# EAGLE board CT_schematic (EAGLE 7.6.0)

Size 100 x 80 mm. Coordinates in mm from the lower left corner, seen from the top.
Outline: 0,0 100,0 100,80 0,80 0,0
Copper layers (1*16): Top 0.035mm / dielectric 1.5mm / Bottom 0.035mm
Design rules "default": minimum track width 10mil, minimum drill 24mil, track to track 8mil, track to pad 8mil, pad to pad 8mil, via to via 8mil, smd to smd 8mil, copper to edge 40mil, drill to drill 8mil, minimum pad ring 10mil, minimum via ring 8mil, stop-mask expansion 4mil, vias tented up to drill 0mil, thermal gap 10mil

## Footprints (pad centres in the part's own frame; a part is rotated, then mirrored left to right if it is on the bottom)
C0603 = smd 0.8 x 0.8: 1 -0.762,0; 2 0.762,0
C0402 = smd 0.5 x 0.5: 1 -0.508,0; 2 0.508,0
C1206 = smd 1.3 x 1.6: 1 -1.524,0; 2 1.524,0
C0805 = smd 1.2 x 1.3: 1 -1.016,0; 2 1.016,0
C1210 = smd 1.2 x 2.5: 1 -1.524,0; 2 1.524,0
R0603 = smd 0.8 x 0.8: 1 -0.762,0; 2 0.762,0
EXV-9H = smd 3.505 x 1.676: 1 -2.857,0; 2 2.857,0
L0603 = smd 0.8 x 0.8: 1 -0.762,0; 2 0.762,0
DR1040 = smd 1.6 x 3.2: 1 -4.458,0; 2 4.458,0
PJ-037B_PACKAGE = drill 3.7 square: 1 12,0 | drill 3.2 square: 2 6,0
LQFP176 = smd 0.3 x 1.2: 1 -10.75,-12.75; 2 -10.25,-12.75; 3 -9.75,-12.75; 4 -9.25,-12.75; 5 -8.75,-12.75; 6 -8.25,-12.75; 7 -7.75,-12.75; 8 -7.25,-12.75; 9 -6.75,-12.75; 10 -6.25,-12.75; 11 -5.75,-12.75; 12 -5.25,-12.75; 13 -4.75,-12.75; 14 -4.25,-12.75; 15 -3.75,-12.75; 16 -3.25,-12.75; 17 -2.75,-12.75; 18 -2.25,-12.75; 19 -1.75,-12.75; 20 -1.25,-12.75; 21 -0.75,-12.75; 22 -0.25,-12.75; 23 0.25,-12.75; 24 0.75,-12.75; 25 1.25,-12.75; 26 1.75,-12.75; 27 2.25,-12.75; 28 2.75,-12.75; 29 3.25,-12.75; 30 3.75,-12.75; 31 4.25,-12.75; 32 4.75,-12.75; 33 5.25,-12.75; 34 5.75,-12.75; 35 6.25,-12.75; 36 6.75,-12.75; 37 7.25,-12.75; 38 7.75,-12.75; 39 8.25,-12.75; 40 8.75,-12.75; 41 9.25,-12.75; 42 9.75,-12.75; 43 10.25,-12.75; 44 10.75,-12.75; 89 10.75,12.75; 90 10.25,12.75; 91 9.75,12.75; 92 9.25,12.75; 93 8.75,12.75; 94 8.25,12.75; 95 7.75,12.75; 96 7.25,12.75; 97 6.75,12.75; 98 6.25,12.75; 99 5.75,12.75; 100 5.25,12.75; 101 4.75,12.75; 102 4.25,12.75; 103 3.75,12.75; 104 3.25,12.75; 105 2.75,12.75; 106 2.25,12.75; 107 1.75,12.75; 108 1.25,12.75; 109 0.75,12.75; 110 0.25,12.75; 111 -0.25,12.75; 112 -0.75,12.75; 113 -1.25,12.75; 114 -1.75,12.75; 115 -2.25,12.75; 116 -2.75,12.75; 117 -3.25,12.75; 118 -3.75,12.75; 119 -4.25,12.75; 120 -4.75,12.75; 121 -5.25,12.75; 122 -5.75,12.75; 123 -6.25,12.75; 124 -6.75,12.75; 125 -7.25,12.75; 126 -7.75,12.75; 127 -8.25,12.75; 128 -8.75,12.75; 129 -9.25,12.75; 130 -9.75,12.75; 131 -10.25,12.75; 132 -10.75,12.75 | smd 1.2 x 0.3: 45 12.75,-10.75; 46 12.75,-10.25; 47 12.75,-9.75; 48 12.75,-9.25; 49 12.75,-8.75; 50 12.75,-8.25; 51 12.75,-7.75; 52 12.75,-7.25; 53 12.75,-6.75; 54 12.75,-6.25; 55 12.75,-5.75; 56 12.75,-5.25; 57 12.75,-4.75; 58 12.75,-4.25; 59 12.75,-3.75; 60 12.75,-3.25; 61 12.75,-2.75; 62 12.75,-2.25; 63 12.75,-1.75; 64 12.75,-1.25; 65 12.75,-0.75; 66 12.75,-0.25; 67 12.75,0.25; 68 12.75,0.75; 69 12.75,1.25; 70 12.75,1.75; 71 12.75,2.25; 72 12.75,2.75; 73 12.75,3.25; 74 12.75,3.75; 75 12.75,4.25; 76 12.75,4.75; 77 12.75,5.25; 78 12.75,5.75; 79 12.75,6.25; 80 12.75,6.75; 81 12.75,7.25; 82 12.75,7.75; 83 12.75,8.25; 84 12.75,8.75; 85 12.75,9.25; 86 12.75,9.75; 87 12.75,10.25; 88 12.75,10.75; 133 -12.75,10.75; 134 -12.75,10.25; 135 -12.75,9.75; 136 -12.75,9.25; 137 -12.75,8.75; 138 -12.75,8.25; 139 -12.75,7.75; 140 -12.75,7.25; 141 -12.75,6.75; 142 -12.75,6.25; 143 -12.75,5.75; 144 -12.75,5.25; 145 -12.75,4.75; 146 -12.75,4.25; 147 -12.75,3.75; 148 -12.75,3.25; 149 -12.75,2.75; 150 -12.75,2.25; 151 -12.75,1.75; 152 -12.75,1.25; 153 -12.75,0.75; 154 -12.75,0.25; 155 -12.75,-0.25; 156 -12.75,-0.75; 157 -12.75,-1.25; 158 -12.75,-1.75; 159 -12.75,-2.25; 160 -12.75,-2.75; 161 -12.75,-3.25; 162 -12.75,-3.75; 163 -12.75,-4.25; 164 -12.75,-4.75; 165 -12.75,-5.25; 166 -12.75,-5.75; 167 -12.75,-6.25; 168 -12.75,-6.75; 169 -12.75,-7.25; 170 -12.75,-7.75; 171 -12.75,-8.25; 172 -12.75,-8.75; 173 -12.75,-9.25; 174 -12.75,-9.75; 175 -12.75,-10.25; 176 -12.75,-10.75
SOT-23-6 = smd 1.1 x 0.6: 1 -1.4,0.95; 2 -1.4,0; 3 -1.4,-0.95; 4 1.4,-0.95; 5 1.4,0; 6 1.4,0.95
TST-110-05-T-D-RA = drill 1 pad 1.7 square: 1 0,0 | drill 1 pad 1.7: 2 0,2.54; 3 2.54,0; 4 2.54,2.54; 5 5.08,0; 6 5.08,2.54; 7 7.62,0; 8 7.62,2.54; 9 10.16,0; 10 10.16,2.54; 11 12.7,0; 12 12.7,2.54; 13 15.24,0; 14 15.24,2.54; 15 17.78,0; 16 17.78,2.54; 17 20.32,0; 18 20.32,2.54; 19 22.86,0; 20 22.86,2.54
LBGA-64 = smd 0.559 x 0.559: A1 -3.5,3.5; A2 -2.5,3.5; A3 -1.5,3.5; A4 -0.5,3.5; A5 0.5,3.5; A6 1.5,3.5; A7 2.5,3.5; A8 3.5,3.5; B1 -3.5,2.5; B2 -2.5,2.5; B3 -1.5,2.5; B4 -0.5,2.5; B5 0.5,2.5; B6 1.5,2.5; B7 2.5,2.5; B8 3.5,2.5; C1 -3.5,1.5; C2 -2.5,1.5; C3 -1.5,1.5; C4 -0.5,1.5; C5 0.5,1.5; C6 1.5,1.5; C7 2.5,1.5; C8 3.5,1.5; D1 -3.5,0.5; D2 -2.5,0.5; D3 -1.5,0.5; D4 -0.5,0.5; D5 0.5,0.5; D6 1.5,0.5; D7 2.5,0.5; D8 3.5,0.5; E1 -3.5,-0.5; E2 -2.5,-0.5; E3 -1.5,-0.5; E4 -0.5,-0.5; E5 0.5,-0.5; E6 1.5,-0.5; E7 2.5,-0.5; E8 3.5,-0.5; F1 -3.5,-1.5; F2 -2.5,-1.5; F3 -1.5,-1.5; F4 -0.5,-1.5; F5 0.5,-1.5; F6 1.5,-1.5; F7 2.5,-1.5; F8 3.5,-1.5; G1 -3.5,-2.5; G2 -2.5,-2.5; G3 -1.5,-2.5; G4 -0.5,-2.5; G5 0.5,-2.5; G6 1.5,-2.5; G7 2.5,-2.5; G8 3.5,-2.5; H1 -3.5,-3.5; H2 -2.5,-3.5; H3 -1.5,-3.5; H4 -0.5,-3.5; H5 0.5,-3.5; H6 1.5,-3.5; H7 2.5,-3.5; H8 3.5,-3.5
RTL8201FL-VB-CG = smd 0.27 x 1: 1 0,0; 2 0.5,0; 3 1,0; 4 1.5,0; 5 2,0; 6 2.5,0; 7 3,0; 8 3.5,0; 9 4,0; 10 4.5,0; 11 5,0; 12 5.5,0; 25 5.5,8; 26 5,8; 27 4.5,8; 28 4,8; 29 3.5,8; 30 3,8; 31 2.5,8; 32 2,8; 33 1.5,8; 34 1,8; 35 0.5,8; 36 0,8 | smd 1 x 0.27: 13 6.75,1.25; 14 6.75,1.75; 15 6.75,2.25; 16 6.75,2.75; 17 6.75,3.25; 18 6.75,3.75; 19 6.75,4.25; 20 6.75,4.75; 21 6.75,5.25; 22 6.75,5.75; 23 6.75,6.25; 24 6.75,6.75; 37 -1.25,6.75; 38 -1.25,6.25; 39 -1.25,5.75; 40 -1.25,5.25; 41 -1.25,4.75; 42 -1.25,4.25; 43 -1.25,3.75; 44 -1.25,3.25; 45 -1.25,2.75; 46 -1.25,2.25; 47 -1.25,1.75; 48 -1.25,1.25
7498011122R = smd 0.71 x 2.29: 1 -3.545,-3.18; 2 -2.525,-3.18; 3 -1.505,-3.18; 4 -0.485,-3.18; 5 0.535,-3.18; 6 1.555,-3.18; 8 3.595,-3.18; 9 5.635,-3.18; 10 6.655,-3.18; 11 -6.605,-3.18; 12 -5.585,-3.18 | smd 1.4 x 2.54: 13 -8.51,10.2; 14 8.51,10.2 | hole 1.4: -3.5,0; 3.5,0
USB-A-H = drill 0.914: 1 2.718,3.493; 2 2.718,1.003; 3 2.718,-1.003; 4 2.718,-3.493 | drill 2.311: 5 0,-6.566; 6 0,6.566
SOT143B = smd 1 x 0.7: 1 -0.75,-1 | smd 0.6 x 0.7: 2 0.95,-1; 3 0.95,1; 4 -0.95,1
ABS07-32.768KHZ-7-T = smd 1.1 x 2.4: 1 -2.5,0; 2 0,0
ABLS-25.000MHZ-B2F-T = smd 5.6 x 2.8: 1 -3.81,0; 2 5.69,0
ASFL1 = smd 1.7 x 1.5: 1 -1.27,-1.1; 2 1.27,-1.1; 3 1.27,1.1; 4 -1.27,1.1
WSON-8 = smd 0.3 x 0.6: 1 -0.75,0; 2 0.05,0; 3 0.85,0; 4 1.65,0; 5 1.65,3.8; 6 0.85,3.8; 7 0.05,3.8; 8 -0.75,3.8 | smd 3 x 2.6: PAD 0.45,1.9
HTSSOP14 = smd 1.676 x 0.356: 1 -2.8,1.95; 2 -2.8,1.3; 3 -2.8,0.65; 4 -2.8,0; 5 -2.8,-0.65; 6 -2.8,-1.3; 7 -2.8,-1.95; 8 2.8,-1.95; 9 2.8,-1.3; 10 2.8,-0.65; 11 2.8,0; 12 2.8,0.65; 13 2.8,1.3; 14 2.8,1.95 | smd 3 x 5: 15 0,0 | drill 0.4 pad 0.45: P$1 -0.75,1.5; P$2 0.75,1.5; P$3 -0.75,0; P$4 0.8,0; P$5 -0.75,-1.5; P$6 0.9,-1.5
QFN-38_UHF = smd 0.75 x 0.3: 1 -2.4,2.75; 2 -2.4,2.25; 3 -2.4,1.75; 4 -2.4,1.25; 6 -2.4,0.25; 7 -2.4,-0.25; 8 -2.4,-0.75; 9 -2.4,-1.25; 10 -2.4,-1.75; 11 -2.4,-2.25; 12 -2.4,-2.75; 20 2.4,-2.75; 21 2.4,-2.25; 22 2.4,-1.75; 23 2.4,-1.25; 24 2.4,-0.75; 25 2.4,-0.25; 26 2.4,0.25; 27 2.4,0.75; 28 2.4,1.25; 29 2.4,1.75; 30 2.4,2.25; 31 2.4,2.75 | smd 0.758 x 0.3: 5 -2.4,0.75 | smd 0.3 x 0.75: 13 -1.5,-3.4; 14 -1,-3.4; 15 -0.5,-3.4; 16 0,-3.4; 17 0.5,-3.4; 18 1,-3.4; 19 1.5,-3.4; 32 1.5,3.4; 33 1,3.4; 34 0.5,3.4; 35 0,3.4; 36 -0.5,3.4; 37 -1,3.4; 38 -1.5,3.4 | smd 3.2 x 5.2: 39 0,0
IRF8306MTRPBF = smd 0.9 x 1.85: 1 0,0; 2 0,-2.35; 6 6.4,0; 7 6.4,-2.35 | smd 0.75 x 0.75: 3 1.75,-1.175 | smd 1.45 x 0.87: 4 3.5,-0.565; 5 3.5,-1.785
SW_4-1437565-2 = smd 1.4 x 2.1: 1 -2.23,4.55; 2 -2.23,-4.55; 3 2.23,4.55; 4 2.23,-4.55
LGM67K-G1J2-24-Z = smd 0.8 x 1.4: A -2,0; C 0,0
NC7SZ125M5X = smd 1.3 x 0.7: 1 -1.3,0.95; 2 -1.3,0; 3 -1.3,-0.95; 4 1.3,-0.95; 5 1.3,0.95

## Placement (x,y rotation side)
C1  1e-06  [C0603]  -57.15,88.9 0 top  (outside the outline)
C2  1e-07  [C0603]  -60.96,88.9 0 top  (outside the outline)
C3  1e-07  [C0603]  -64.77,88.9 0 top  (outside the outline)
C4  1e-07  [C0603]  -68.58,88.9 0 top  (outside the outline)
C5  1e-07  [C0603]  -72.39,88.9 0 top  (outside the outline)
C6  1e-07  [C0603]  -76.2,88.9 0 top  (outside the outline)
C7  1e-07  [C0603]  -80.01,88.9 0 top  (outside the outline)
C8  1e-07  [C0603]  -83.82,88.9 0 top  (outside the outline)
C9  1e-07  [C0603]  -87.63,88.9 0 top  (outside the outline)
C10  1e-07  [C0603]  -91.44,88.9 0 top  (outside the outline)
C11  1e-07  [C0603]  -95.25,88.9 0 top  (outside the outline)
C12  1e-07  [C0603]  -15.24,93.98 0 top  (outside the outline)
C13  1e-07  [C0603]  -19.05,93.98 0 top  (outside the outline)
C14  1e-07  [C0603]  -22.86,93.98 0 top  (outside the outline)
C15  1e-07  [C0603]  -26.67,93.98 0 top  (outside the outline)
C16  1e-07  [C0603]  -30.48,93.98 0 top  (outside the outline)
C17  1e-07  [C0603]  -34.29,93.98 0 top  (outside the outline)
C18  4.7e-06  [C0603]  -49.53,88.9 0 top  (outside the outline)
C19  1e-07  [C0603]  -38.1,93.98 0 top  (outside the outline)
C20  1e-08  [C0603]  -41.91,93.98 0 top  (outside the outline)
C21  1e-06  [C0603]  -45.72,93.98 0 top  (outside the outline)
C22  1e-07  [C0603]  -49.53,93.98 0 top  (outside the outline)
C23  1e-07  [C0603]  -53.34,93.98 0 top  (outside the outline)
C24  1e-07  [C0603]  -57.15,93.98 0 top  (outside the outline)
C25  1e-11  [C0402]  -77.47,99.06 0 top  (outside the outline)
C26  1e-11  [C0402]  -81.28,99.06 0 top  (outside the outline)
C27  1e-11  [C0402]  -85.09,99.06 0 top  (outside the outline)
C28  1e-11  [C0402]  -88.9,99.06 0 top  (outside the outline)
C29  1e-07  [C0402]  -92.71,99.06 0 top  (outside the outline)
C30  1e-07  [C0402]  -96.52,99.06 0 top  (outside the outline)
C31  1e-08  [C0402]  -15.24,104.14 0 top  (outside the outline)
C32  1e-08  [C0402]  -19.05,104.14 0 top  (outside the outline)
C33  2.2e-08  [C0402]  -69.85,99.06 0 top  (outside the outline)
C34  1e-06  [C0603]  -60.96,93.98 0 top  (outside the outline)
C35  1e-07  [C0402]  -22.86,104.14 0 top  (outside the outline)
C36  1e-08  [C0402]  -26.67,104.14 0 top  (outside the outline)
C37  1e-06  [C0603]  -64.77,93.98 0 top  (outside the outline)
C38  1e-07  [C0402]  -30.48,104.14 0 top  (outside the outline)
C39  1e-08  [C0402]  -34.29,104.14 0 top  (outside the outline)
C40  1e-07  [C0402]  -38.1,104.14 0 top  (outside the outline)
C41  1e-07  [C0402]  -41.91,104.14 0 top  (outside the outline)
C42  1e-08  [C0402]  -45.72,104.14 0 top  (outside the outline)
C43  1e-08  [C0402]  -49.53,104.14 0 top  (outside the outline)
C44  1e-05  [C1206]  -16.51,72.39 0 top  (outside the outline)
C45  1e-05  [C0805]  -77.47,72.39 0 top  (outside the outline)
C46  1e-06  [C0603]  -68.58,93.98 0 top  (outside the outline)
C47  3.3e-09  [C0402]  -73.66,99.06 0 top  (outside the outline)
C48  1e-07  [C0402]  -53.34,104.14 0 top  (outside the outline)
C49  2.2e-05  [C1210]  -78.74,64.77 0 top  (outside the outline)
C50  2.2e-05  [C1210]  -85.09,64.77 0 top  (outside the outline)
C51  1e-05  [C1206]  -22.86,72.39 0 top  (outside the outline)
C52  1e-05  [C1206]  -29.21,72.39 0 top  (outside the outline)
C53  1e-08  [C0402]  -57.15,104.14 0 top  (outside the outline)
C54  1e-05  [C1206]  -35.56,72.39 0 top  (outside the outline)
C55  1e-05  [C1210]  -91.44,64.77 0 top  (outside the outline)
C56  1e-08  [C0402]  -60.96,104.14 0 top  (outside the outline)
C57  1e-05  [C1206]  -41.91,72.39 0 top  (outside the outline)
C58  1e-05  [C0805]  -82.55,72.39 0 top  (outside the outline)
C59  1e-07  [C0402]  -64.77,104.14 0 top  (outside the outline)
C60  2.2e-06  [C0603]  -53.34,88.9 0 top  (outside the outline)
C61  2.45e-08  [R0603]  -52.07,78.74 0 top  (outside the outline)
C62  2.8258362168397e-09  [R0603]  -92.71,72.39 0 top  (outside the outline)
C63  7.105e-09  [R0603]  -31.75,78.74 0 top  (outside the outline)
C64  0.0001  [EXV-9H]  -81.28,55.88 0 top  (outside the outline)
C65  0.0001  [EXV-9H]  -92.71,55.88 0 top  (outside the outline)
C66  1e-08  [C0402]  -68.58,104.14 0 top  (outside the outline)
C67  1e-08  [C0402]  -72.39,104.14 0 top  (outside the outline)
C68  1e-08  [C0402]  -76.2,104.14 0 top  (outside the outline)
C69  1e-08  [C0402]  -80.01,104.14 0 top  (outside the outline)
F1  240.0  [L0603]  -72.39,93.98 0 top  (outside the outline)
I1  97.0  [R0603]  -76.2,93.98 0 top  (outside the outline)
I5  3.8e-06  [DR1040]  -71.12,34.29 0 top  (outside the outline)
J1  PJ-037B  [PJ-037B_PACKAGE]  -44.45,35.56 0 top  (outside the outline)
R2  1000.0  [R0603]  -80.01,93.98 0 top  (outside the outline)
R7  4700.0  [R0603]  -83.82,93.98 0 top  (outside the outline)
R8  4700.0  [R0603]  -87.63,93.98 0 top  (outside the outline)
R9  4700.0  [R0603]  -91.44,93.98 0 top  (outside the outline)
R10  2200.0  [R0603]  -95.25,93.98 0 top  (outside the outline)
R12  2200.0  [R0603]  -15.24,99.06 0 top  (outside the outline)
R14  47000.0  [R0603]  -57.15,78.74 0 top  (outside the outline)
R15  10000.0  [R0603]  -62.23,78.74 0 top  (outside the outline)
R16  10000.0  [R0603]  -67.31,78.74 0 top  (outside the outline)
R17  10000.0  [R0603]  -72.39,78.74 0 top  (outside the outline)
R18  1270.0  [R0603]  -19.05,99.06 0 top  (outside the outline)
R19  10000.0  [R0603]  -77.47,78.74 0 top  (outside the outline)
R20  10000.0  [R0603]  -82.55,78.74 0 top  (outside the outline)
R21  10000.0  [R0603]  -87.63,78.74 0 top  (outside the outline)
R22  10000.0  [R0603]  -92.71,78.74 0 top  (outside the outline)
R23  10000.0  [R0603]  -97.79,78.74 0 top  (outside the outline)
R24  10000.0  [R0603]  -15.24,83.82 0 top  (outside the outline)
R25  10000.0  [R0603]  -20.32,83.82 0 top  (outside the outline)
R26  10000.0  [R0603]  -25.4,83.82 0 top  (outside the outline)
R27  10000.0  [R0603]  -30.48,83.82 0 top  (outside the outline)
R28  10000.0  [R0603]  -35.56,83.82 0 top  (outside the outline)
R29  10000.0  [R0603]  -40.64,83.82 0 top  (outside the outline)
R30  10000.0  [R0603]  -45.72,83.82 0 top  (outside the outline)
R31  10000.0  [R0603]  -50.8,83.82 0 top  (outside the outline)
R32  0.1  [R0603]  -22.86,99.06 0 top  (outside the outline)
R33  0.1  [R0603]  -26.67,99.06 0 top  (outside the outline)
R34  200.0  [R0603]  -30.48,99.06 0 top  (outside the outline)
R35  200.0  [R0603]  -34.29,99.06 0 top  (outside the outline)
R36  2490.0  [R0603]  -38.1,99.06 0 top  (outside the outline)
R37  4700.0  [R0603]  -41.91,99.06 0 top  (outside the outline)
R38  10000.0  [R0603]  -55.88,83.82 0 top  (outside the outline)
R39  10000.0  [R0603]  -60.96,83.82 0 top  (outside the outline)
R40  10000.0  [R0603]  -66.04,83.82 0 top  (outside the outline)
R41  10000.0  [R0603]  -71.12,83.82 0 top  (outside the outline)
R42  10000.0  [R0603]  -76.2,83.82 0 top  (outside the outline)
R43  10000.0  [R0603]  -81.28,83.82 0 top  (outside the outline)
R44  100000.0  [R0603]  -36.83,78.74 0 top  (outside the outline)
R45  200.0  [R0603]  -45.72,99.06 0 top  (outside the outline)
R46  1000.0  [R0603]  -49.53,99.06 0 top  (outside the outline)
R47  71007.101651032  [R0603]  -19.05,78.74 0 top  (outside the outline)
R48  22000.0  [R0603]  -86.36,83.82 0 top  (outside the outline)
R49  100000.0  [R0603]  -41.91,78.74 0 top  (outside the outline)
R50  3900.0  [R0603]  -53.34,99.06 0 top  (outside the outline)
R51  1000.0  [R0603]  -57.15,99.06 0 top  (outside the outline)
R52  100000.0  [R0603]  -46.99,78.74 0 top  (outside the outline)
R53  200.0  [R0603]  -60.96,99.06 0 top  (outside the outline)
R54  1000.0  [R0603]  -64.77,99.06 0 top  (outside the outline)
R55  10000.0  [R0603]  -91.44,83.82 0 top  (outside the outline)
R56  75000.0  [R0603]  -96.52,83.82 0 top  (outside the outline)
R57  10000.0  [R0603]  -15.24,88.9 0 top  (outside the outline)
R58  10000.0  [R0603]  -20.32,88.9 0 top  (outside the outline)
R59  95300.0  [R0603]  -25.4,88.9 0 top  (outside the outline)
R60  95300.0  [R0603]  -30.48,88.9 0 top  (outside the outline)
R61  10000.0  [R0603]  -35.56,88.9 0 top  (outside the outline)
R62  10000.0  [R0603]  -40.64,88.9 0 top  (outside the outline)
R63  10000.0  [R0603]  -45.72,88.9 0 top  (outside the outline)
R64  85527.272727273  [R0603]  -26.67,78.74 0 top  (outside the outline)
U1  STM32F769IGT6  [LQFP176]  -45.72,13.97 0 top  (outside the outline)
U2  MAX4995AAUT+T  [SOT-23-6]  -46.99,71.12 0 top  (outside the outline)
U3  TST-110-05-T-D-RA  [TST-110-05-T-D-RA]  -73.66,53.34 0 top  (outside the outline)
U4  mt28ew512aba1HPC-0AAT  [LBGA-64]  -82.55,7.62 0 top  (outside the outline)
U5  RTL8201FL-VB-CG  [RTL8201FL-VB-CG]  -27.94,31.75 0 top  (outside the outline)
U6  7498011122R  [7498011122R]  -22.86,7.62 0 top  (outside the outline)
U7  61400416021  [USB-A-H]  -66.04,8.89 0 top  (outside the outline)
U8  prtr5v0u2ax  [SOT143B]  -92.71,104.14 0 top  (outside the outline)
U9  ABS07-32.768KHZ-7-T  [ABS07-32.768KHZ-7-T]  -49.53,66.04 0 top  (outside the outline)
U10  ABLS-25.000MHZ-B2F-T  [ABLS-25.000MHZ-B2F-T]  -26.67,66.04 0 top  (outside the outline)
U11  ASFL1-25MHZ-NCS  [ASFL1]  -26.67,57.15 0 top  (outside the outline)
U12  LP3878SDX-ADJ/NOPB  [WSON-8]  -45.72,45.72 0 top  (outside the outline)
U13  tps54325PWP  [HTSSOP14]  -58.42,64.77 0 top  (outside the outline)
U14  LP3878SDX-ADJ/NOPB  [WSON-8]  -66.04,45.72 0 top  (outside the outline)
U15  LP3878SDX-ADJ/NOPB  [WSON-8]  -86.36,45.72 0 top  (outside the outline)
U16  LTC2928CUHF#PBF  [QFN-38_UHF]  -34.29,55.88 0 top  (outside the outline)
U17  IRF8306MTRPbF  [IRF8306MTRPBF]  -90.17,34.29 0 top  (outside the outline)
U18  IRF8306MTRPbF  [IRF8306MTRPBF]  -26.67,48.26 0 top  (outside the outline)
U19  4-1437565-2  [SW_4-1437565-2]  -60.96,34.29 0 top  (outside the outline)
U20  Q65110A2395  [LGM67K-G1J2-24-Z]  -67.31,64.77 0 top  (outside the outline)
U21  nc7sz125m5x  [NC7SZ125M5X]  -52.07,72.39 0 top  (outside the outline)
U22  nc7sz125m5x  [NC7SZ125M5X]  -58.42,72.39 0 top  (outside the outline)
U23  nc7sz125m5x  [NC7SZ125M5X]  -64.77,72.39 0 top  (outside the outline)
U24  nc7sz125m5x  [NC7SZ125M5X]  -71.12,72.39 0 top  (outside the outline)

## Library data of the parts
C1-C69 F1 I1 I5 J1 R2 R7-R10 R12 R14-R64 U1-U24 = circuit_tree

## Nets
CLK_CRYSTAL_U1_9: C25.1 U1.9 U9.1
CLK_CRYSTAL_U1_10: C26.1 U1.10 U9.2
CLK_CRYSTAL_U1_29: C27.1 U1.29 U10.1
CLK_CRYSTAL_U1_30: C28.1 U1.30 U10.2
CLK_U5_43: U5.43 U11.3
GND: C1.2 C2.2 C3.2 C4.2 C5.2 C6.2 C7.2 C8.2 C9.2 C10.2 C11.2 C12.2 C13.2 C14.2 C15.2 C16.2 C17.2 C18.2 C19.2 C20.2 C21.2 C22.2 C23.2 C24.2 C25.2 C26.2 C27.2 C28.2 C29.2 C30.2 C31.2 C32.2 C33.2 C34.2 C35.2 C36.2 C37.2 C38.2 C39.2 C40.2 C41.2 C42.2 C43.2 C44.2 C45.2 C46.2 C47.2 C49.2 C50.2 C51.2 C52.2 C53.2 C54.2 C55.2 C56.2 C57.2 C58.2 C59.2 C60.2 C61.2 C62.2 C63.2 C64.2 C65.2 C66.2 C67.2 C68.2 C69.2 J1.2 R2.2 R14.2 R15.2 R18.2 R20.2 R26.2 R32.2 R33.2 R36.2 R38.2 R40.2 R41.2 R42.2 R46.2 R48.2 R51.2 R54.2 R56.2 R59.2 R60.2 R61.2 R62.2 R63.2 U1.14 U1.22 U1.37 U1.61 U1.71 U1.95 U1.103 U1.109 U1.117 U1.130 U1.135 U1.148 U1.158 U2.2 U3.4 U3.6 U3.8 U3.10 U3.12 U3.14 U3.16 U3.18 U3.20 U4.E8 U4.H2 U4.H7 U5.7 U5.20 U5.33 U5.42 U5.47 U6.11 U7.4 U7.5 U7.6 U8.1 U11.2 U12.3 U12.PAD U13.5 U13.8 U13.9 U13.15 U14.3 U14.PAD U15.3 U15.PAD U16.8 U16.9 U16.10 U16.12 U16.13 U16.24 U16.25 U16.30 U16.32 U16.39 U20.C U21.2 U21.3 U22.1 U22.3 U23.1 U23.3 U24.1 U24.3
NET_U1_31: R9.1 U1.31 U24.4
NET_U1_33: R10.1 U1.33 U5.30
NET_U1_39: C20.1 C21.1 F1.1 U1.38 U1.39
NET_U1_42: R12.1 U1.42 U5.31
NET_U1_48: R17.1 U1.48
NET_U1_100: U1.100
NET_U1_106: U1.106
NET_U1_125: R18.1 U1.125
NET_U1_129: C24.1 U1.129
NET_U1_166: R15.1 U1.166
NET_U1_171: R16.1 U1.171
NET_U1_175: U20.A
NET_U1_176: U19.3 U19.4
NET_U2_3: R14.1 U2.3
NET_U3_19: R26.1 U3.19
NET_U4_B4: R30.1 U4.B4
NET_U4_B5: R8.1 U4.B5 U23.4
NET_U5_6: C34.1 C35.1 C36.1 I1.1 U5.6 U5.41
NET_U5_10: R41.1 U5.10
NET_U5_28: U5.28
NET_U5_29: R7.1 U5.29 U22.4
NET_U5_32: R37.1 U5.32
NET_U5_34: R39.1 U5.34
NET_U5_35: R40.1 U5.35
NET_U5_40: C41.1 U5.40
NET_U5_46: R36.1 U5.46
NET_U5_48: C40.1 U5.48
NET_U6_1: U5.1 U6.1
NET_U6_3: U5.2 U6.3
NET_U6_4: U5.4 U6.4
NET_U6_5: C33.1 U6.2 U6.5
NET_U6_6: U5.5 U6.6
NET_U6_8: R33.1 U6.8
NET_U6_10: R34.1 U6.10
NET_U6_12: R35.1 U6.12
NET_U6_13: R32.1 U6.13 U6.14
NET_U6_34: R34.2
NET_U6_35: R35.2
NET_U12_1: C43.1 U12.1
NET_U12_6: R45.2 R46.1 U12.6
NET_U12_8: R44.1 U12.8
NET_U13_2: R47.2 R48.1 U13.2
NET_U13_3: C46.1 U13.3
NET_U13_4: C47.1 U13.4
NET_U13_10: C48.1 I5.1 U13.10 U13.11
NET_U13_12: C48.2 U13.12
NET_U14_1: C53.1 U14.1
NET_U14_6: R50.2 R51.1 U14.6
NET_U14_8: R49.1 U14.8
NET_U15_1: C56.1 U15.1
NET_U15_6: R53.2 R54.1 U15.6
NET_U15_8: R52.1 U15.8
NET_U16_3: R62.1 U16.3
NET_U16_6: R59.1 U16.6
NET_U16_7: R60.1 U16.7
NET_U16_16: R61.1 R64.1 U16.16
NET_U16_18: R58.1 U16.18
NET_U16_19: R57.1 U16.19 U16.20
NET_U16_21: R55.1 R56.1 U16.21 U21.4 U22.2 U23.2 U24.2
NET_U16_22: C59.1 R55.2 R57.2 R58.2 U16.11 U16.22
NET_U16_26: C62.1 U16.26
NET_U16_27: C61.1 U16.27
NET_U16_28: C63.1 U16.28
NET_U16_38: R63.1 U16.38
NET_U17_3: U16.2 U17.3
NET_U18_3: U16.37 U18.3
NET_U19_1: R2.1 U19.1 U19.2
PROC_ETH_COL: U1.44 U5.38
PROC_ETH_CRS: U1.43 U5.36
PROC_ETH_RX_CLK: U1.41 U5.19
PROC_ETH_RX_DV: R38.1 U1.53 U5.13
PROC_ETH_RX_ER: R43.1 U1.12 U5.39
PROC_ETH_RXD0: U1.54 U5.14
PROC_ETH_RXD1: U1.55 U5.16
PROC_ETH_RXD2: U1.56 U5.17
PROC_ETH_RXD3: R42.1 U1.57 U5.18
PROC_ETH_TX_CLK: U1.35 U5.22
PROC_ETH_TX_EN: U1.80 U5.27
PROC_ETH_TXD0: U1.85 U5.23
PROC_ETH_TXD1: U1.86 U5.24
PROC_ETH_TXD2: U1.34 U5.25
PROC_ETH_TXD3: U1.167 U5.26
PROC_FMC_A0: U1.16 U4.E2
PROC_FMC_A1: U1.17 U4.D2
PROC_FMC_A2: U1.18 U4.C2
PROC_FMC_A3: U1.19 U4.A2
PROC_FMC_A4: U1.20 U4.B2
PROC_FMC_A5: U1.21 U4.D3
PROC_FMC_A6: U1.60 U4.C3
PROC_FMC_A7: U1.63 U4.A3
PROC_FMC_A8: U1.64 U4.B6
PROC_FMC_A9: U1.65 U4.A6
PROC_FMC_A10: U1.66 U4.C6
PROC_FMC_A11: U1.67 U4.D6
PROC_FMC_A12: U1.110 U4.B7
PROC_FMC_A13: U1.111 U4.A7
PROC_FMC_A14: U1.112 U4.C7
PROC_FMC_A15: U1.113 U4.D7
PROC_FMC_A16: U1.92 U4.E7
PROC_FMC_A17: U1.93 U4.B3
PROC_FMC_A18: U1.94 U4.C4
PROC_FMC_A19: U1.2 U4.D5
PROC_FMC_A20: U1.3 U4.D4
PROC_FMC_A21: U1.4 U4.C5
PROC_FMC_A22: U1.5 U4.B8
PROC_FMC_A23: U1.1 U4.C8
PROC_FMC_A24: U1.156 U4.F8
PROC_FMC_D0: U1.97 U4.E3
PROC_FMC_D1: U1.98 U4.H3
PROC_FMC_D2: U1.142 U4.E4
PROC_FMC_D3: U1.143 U4.H4
PROC_FMC_D4: U1.68 U4.H5
PROC_FMC_D5: U1.69 U4.E5
PROC_FMC_D6: U1.70 U4.H6
PROC_FMC_D7: U1.73 U4.E6
PROC_FMC_D8: U1.74 U4.F3
PROC_FMC_D9: U1.75 U4.G3
PROC_FMC_D10: U1.76 U4.F4
PROC_FMC_D11: U1.77 U4.G4
PROC_FMC_D12: U1.78 U4.F5
PROC_FMC_D13: U1.89 U4.G6
PROC_FMC_D14: U1.90 U4.F6
PROC_FMC_D15: U1.91 U4.G7
PROC_FMC_INT: U1.115 U4.A4
PROC_FMC_NBL0: R31.1 U1.169 U4.F7
PROC_FMC_NE2: R27.1 U1.121 U4.F2
PROC_FMC_NOE: R28.1 U1.146 U4.G2
PROC_FMC_NWE: R29.1 U1.147 U4.A5
PROC_GPIO_TO_U1_USB_FAULT: R19.1 U1.8 U2.6
PROC_GPIO_TO_U1_VBUS_EN: R20.1 U1.7 U2.4
PROC_SYS_JTCK_SWCLK: R24.1 U1.137 U3.9
PROC_SYS_JTDI: R22.1 U1.138 U3.5
PROC_SYS_JTDO_SWO: U1.161 U3.13
PROC_SYS_JTMS_SWDIO: R23.1 U1.128 U3.7
PROC_SYS_JTRST: R21.1 U1.162 U3.3
PROC_USB_OTG_FS_DM: U1.126 U7.2 U8.3
PROC_USB_OTG_FS_DP: U1.127 U7.3 U8.2
PROC_USB_OTG_FS_VBUS: U1.124 U2.1 U7.1 U8.4
RST_OUT_U3_SRESET_B: R25.1 U3.15 U21.1
VCC_10V7: C60.1 C64.1 C65.1 J1.1 R64.2 U16.23 U17.1 U17.2 U17.6 U17.7 U18.1 U18.2 U18.6 U18.7
VCC_S1_10V7: C44.1 C51.1 C52.1 C54.1 R44.2 R49.2 U12.4 U13.7 U13.13 U13.14 U14.4 U17.4 U17.5
VCC_S2_10V7: C57.1 R52.2 U15.4 U18.4 U18.5
VCC_TIER1_1V2: C23.1 C45.1 R45.1 U1.81 U12.5
VCC_TIER1_3V3: C1.1 C2.1 C3.1 C4.1 C5.1 C6.1 C7.1 C8.1 C9.1 C10.1 C11.1 C12.1 C13.1 C14.1 C15.1 C16.1 C17.1 C18.1 C19.1 C22.1 C29.1 C30.1 C31.1 C32.1 C37.1 C38.1 C39.1 C42.1 C49.1 C50.1 C66.1 C67.1 C68.1 C69.1 F1.2 I1.2 I5.2 R7.2 R8.2 R9.2 R10.2 R12.2 R16.2 R17.2 R19.2 R21.2 R22.2 R23.2 R24.2 R25.2 R27.2 R28.2 R29.2 R30.2 R31.2 R37.2 R39.2 R43.2 R47.1 U1.6 U1.15 U1.23 U1.36 U1.49 U1.62 U1.72 U1.82 U1.96 U1.99 U1.118 U1.131 U1.136 U1.149 U1.159 U1.172 U3.1 U3.2 U4.D8 U4.F1 U4.G5 U5.15 U5.21 U5.37 U11.4 U13.1 U21.5 U22.5 U23.5 U24.5
VCC_TIER1_5V0: C55.1 R50.1 U2.5 U14.5
VCC_TIER2_1V2: C58.1 R53.1 U15.5

## Tracks (layer width: path | path; a pad name or v marks a point on that pad's centre or on a via)
CLK_CRYSTAL_U1_9  (2 unrouted)
CLK_CRYSTAL_U1_10  (2 unrouted)
CLK_CRYSTAL_U1_29  (2 unrouted)
CLK_CRYSTAL_U1_30  (2 unrouted)
CLK_U5_43  (1 unrouted)
GND  (157 unrouted)
NET_U1_31  (2 unrouted)
NET_U1_33  (2 unrouted)
NET_U1_39  (4 unrouted)
NET_U1_42  (2 unrouted)
NET_U1_48  (1 unrouted)
NET_U1_125  (1 unrouted)
NET_U1_129  (1 unrouted)
NET_U1_166  (1 unrouted)
NET_U1_171  (1 unrouted)
NET_U1_176  (1 unrouted)
NET_U2_3  (1 unrouted)
NET_U3_19  (1 unrouted)
NET_U4_B4  (1 unrouted)
NET_U4_B5  (2 unrouted)
NET_U5_6  (5 unrouted)
NET_U5_10  (1 unrouted)
NET_U5_29  (2 unrouted)
NET_U5_32  (1 unrouted)
NET_U5_34  (1 unrouted)
NET_U5_35  (1 unrouted)
NET_U5_40  (1 unrouted)
NET_U5_46  (1 unrouted)
NET_U5_48  (1 unrouted)
NET_U6_1  (1 unrouted)
NET_U6_3  (1 unrouted)
NET_U6_4  (1 unrouted)
NET_U6_5  (2 unrouted)
NET_U6_6  (1 unrouted)
NET_U6_8  (1 unrouted)
NET_U6_10  (1 unrouted)
NET_U6_12  (1 unrouted)
NET_U6_13  (2 unrouted)
NET_U12_1  (1 unrouted)
NET_U12_6  (2 unrouted)
NET_U12_8  (1 unrouted)
NET_U13_2  (2 unrouted)
NET_U13_3  (1 unrouted)
NET_U13_4  (1 unrouted)
NET_U13_10  (3 unrouted)
NET_U13_12  (1 unrouted)
NET_U14_1  (1 unrouted)
NET_U14_6  (2 unrouted)
NET_U14_8  (1 unrouted)
NET_U15_1  (1 unrouted)
NET_U15_6  (2 unrouted)
NET_U15_8  (1 unrouted)
NET_U16_3  (1 unrouted)
NET_U16_6  (1 unrouted)
NET_U16_7  (1 unrouted)
NET_U16_16  (2 unrouted)
NET_U16_18  (1 unrouted)
NET_U16_19  (2 unrouted)
NET_U16_21  (6 unrouted)
NET_U16_22  (5 unrouted)
NET_U16_26  (1 unrouted)
NET_U16_27  (1 unrouted)
NET_U16_28  (1 unrouted)
NET_U16_38  (1 unrouted)
NET_U17_3  (1 unrouted)
NET_U18_3  (1 unrouted)
NET_U19_1  (2 unrouted)
PROC_ETH_COL  (1 unrouted)
PROC_ETH_CRS  (1 unrouted)
PROC_ETH_RX_CLK  (1 unrouted)
PROC_ETH_RX_DV  (2 unrouted)
PROC_ETH_RX_ER  (2 unrouted)
PROC_ETH_RXD0  (1 unrouted)
PROC_ETH_RXD1  (1 unrouted)
PROC_ETH_RXD2  (1 unrouted)
PROC_ETH_RXD3  (2 unrouted)
PROC_ETH_TX_CLK  (1 unrouted)
PROC_ETH_TX_EN  (1 unrouted)
PROC_ETH_TXD0  (1 unrouted)
PROC_ETH_TXD1  (1 unrouted)
PROC_ETH_TXD2  (1 unrouted)
PROC_ETH_TXD3  (1 unrouted)
PROC_FMC_A0  (1 unrouted)
PROC_FMC_A1  (1 unrouted)
PROC_FMC_A2  (1 unrouted)
PROC_FMC_A3  (1 unrouted)
PROC_FMC_A4  (1 unrouted)
PROC_FMC_A5  (1 unrouted)
PROC_FMC_A6  (1 unrouted)
PROC_FMC_A7  (1 unrouted)
PROC_FMC_A8  (1 unrouted)
PROC_FMC_A9  (1 unrouted)
PROC_FMC_A10  (1 unrouted)
PROC_FMC_A11  (1 unrouted)
PROC_FMC_A12  (1 unrouted)
PROC_FMC_A13  (1 unrouted)
PROC_FMC_A14  (1 unrouted)
PROC_FMC_A15  (1 unrouted)
PROC_FMC_A16  (1 unrouted)
PROC_FMC_A17  (1 unrouted)
PROC_FMC_A18  (1 unrouted)
PROC_FMC_A19  (1 unrouted)
PROC_FMC_A20  (1 unrouted)
PROC_FMC_A21  (1 unrouted)
PROC_FMC_A22  (1 unrouted)
PROC_FMC_A23  (1 unrouted)
PROC_FMC_A24  (1 unrouted)
PROC_FMC_D0  (1 unrouted)
PROC_FMC_D1  (1 unrouted)
PROC_FMC_D2  (1 unrouted)
PROC_FMC_D3  (1 unrouted)
PROC_FMC_D4  (1 unrouted)
PROC_FMC_D5  (1 unrouted)
PROC_FMC_D6  (1 unrouted)
PROC_FMC_D7  (1 unrouted)
PROC_FMC_D8  (1 unrouted)
PROC_FMC_D9  (1 unrouted)
PROC_FMC_D10  (1 unrouted)
PROC_FMC_D11  (1 unrouted)
PROC_FMC_D12  (1 unrouted)
PROC_FMC_D13  (1 unrouted)
PROC_FMC_D14  (1 unrouted)
PROC_FMC_D15  (1 unrouted)
PROC_FMC_INT  (1 unrouted)
PROC_FMC_NBL0  (2 unrouted)
PROC_FMC_NE2  (2 unrouted)
PROC_FMC_NOE  (2 unrouted)
PROC_FMC_NWE  (2 unrouted)
PROC_GPIO_TO_U1_USB_FAULT  (2 unrouted)
PROC_GPIO_TO_U1_VBUS_EN  (2 unrouted)
PROC_SYS_JTCK_SWCLK  (2 unrouted)
PROC_SYS_JTDI  (2 unrouted)
PROC_SYS_JTDO_SWO  (1 unrouted)
PROC_SYS_JTMS_SWDIO  (2 unrouted)
PROC_SYS_JTRST  (2 unrouted)
PROC_USB_OTG_FS_DM  (2 unrouted)
PROC_USB_OTG_FS_DP  (2 unrouted)
PROC_USB_OTG_FS_VBUS  (3 unrouted)
RST_OUT_U3_SRESET_B  (2 unrouted)
VCC_10V7  (13 unrouted)
VCC_S1_10V7  (12 unrouted)
VCC_S2_10V7  (4 unrouted)
VCC_TIER1_1V2  (4 unrouted)
VCC_TIER1_3V3  (88 unrouted)
VCC_TIER1_5V0  (3 unrouted)
VCC_TIER2_1V2  (2 unrouted)